# Altium PCB Bluepill.PcbDoc
Units mil, origin at the board's own origin, x right, y up, seen from the top; angles counter-clockwise.
Board outline 2100 x 790 mil, 2 copper layers (Top Layer, Bottom Layer); 37 components, 50 nets, 178 pads, 48 vias.
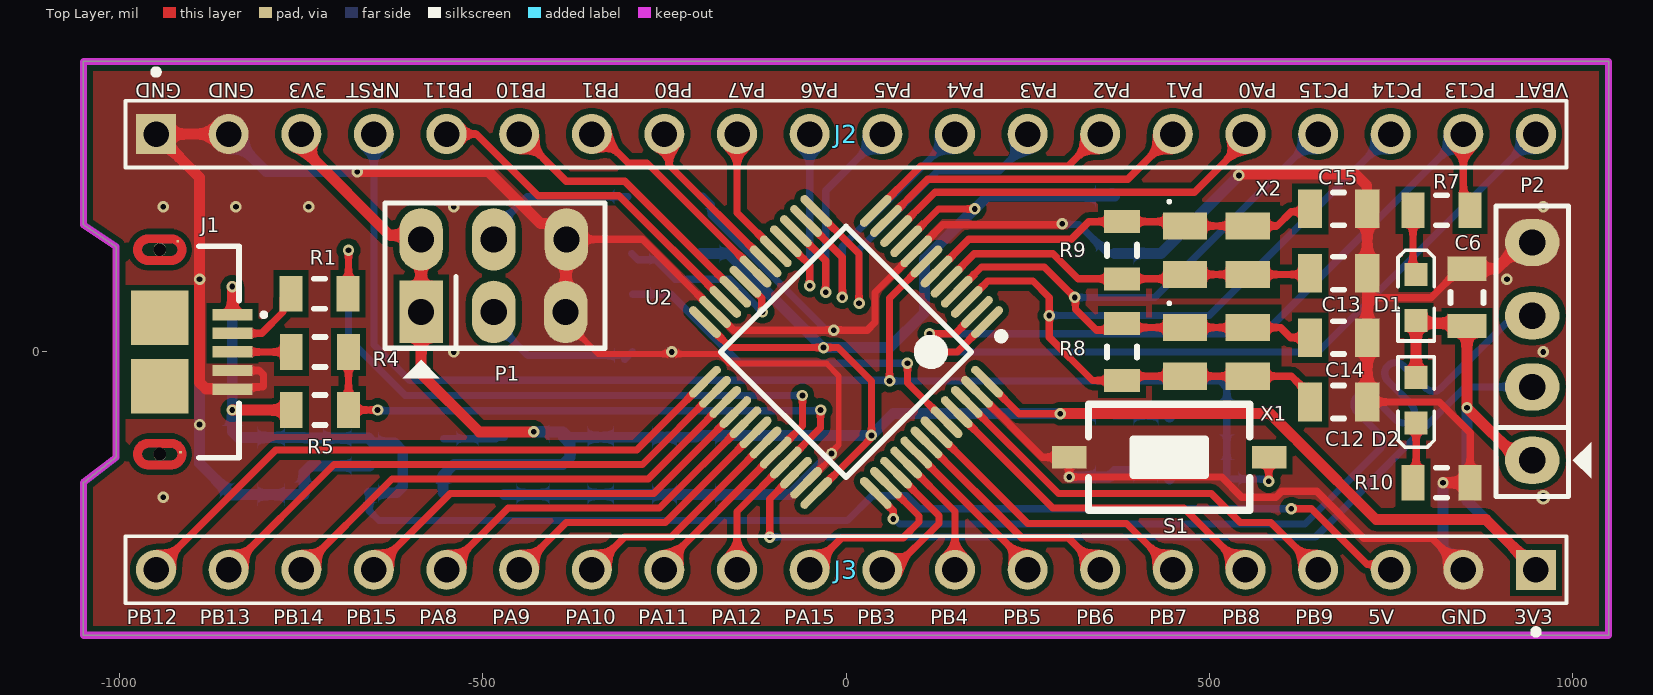
[diagram p0: Top Layer view]
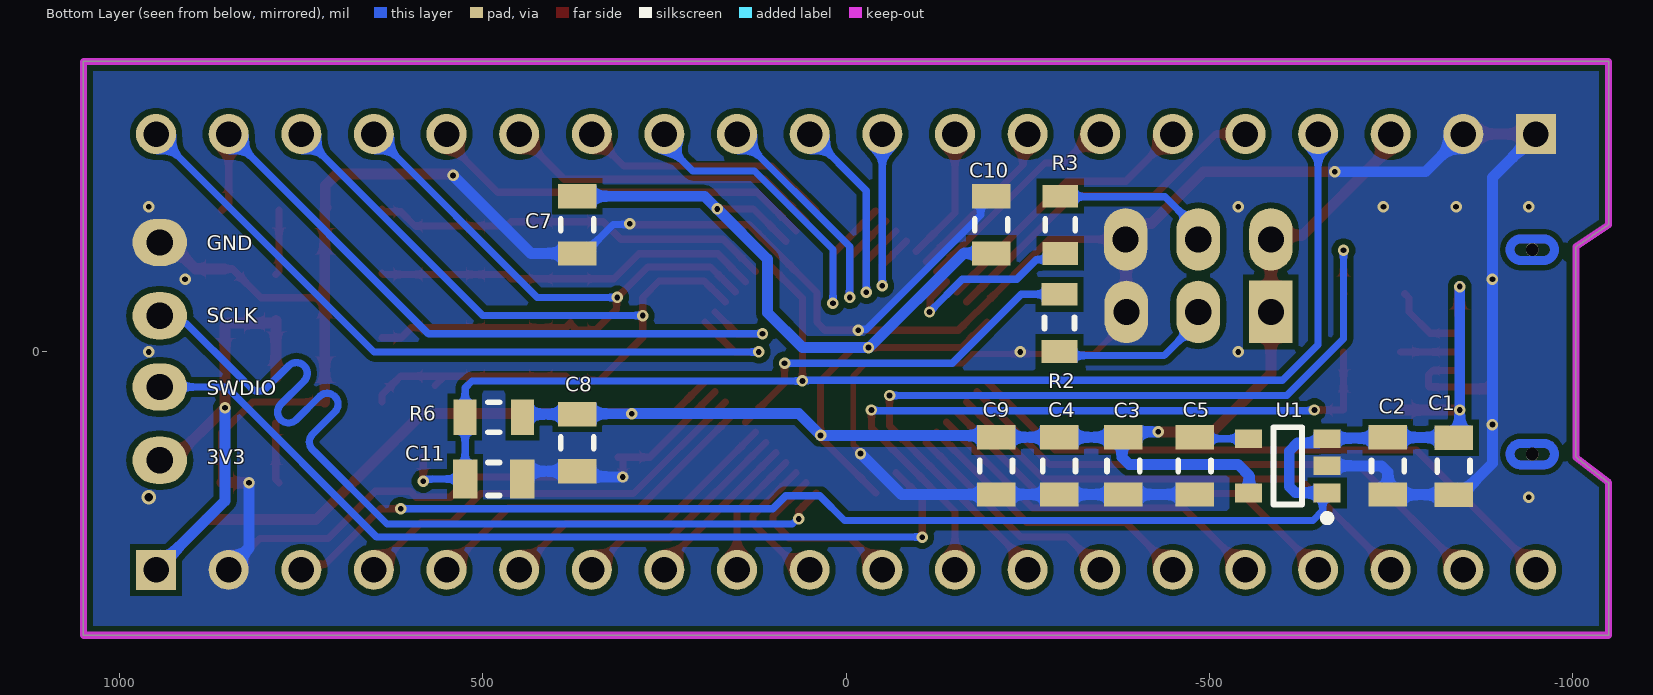
[diagram p1: Bottom Layer view, seen from below]
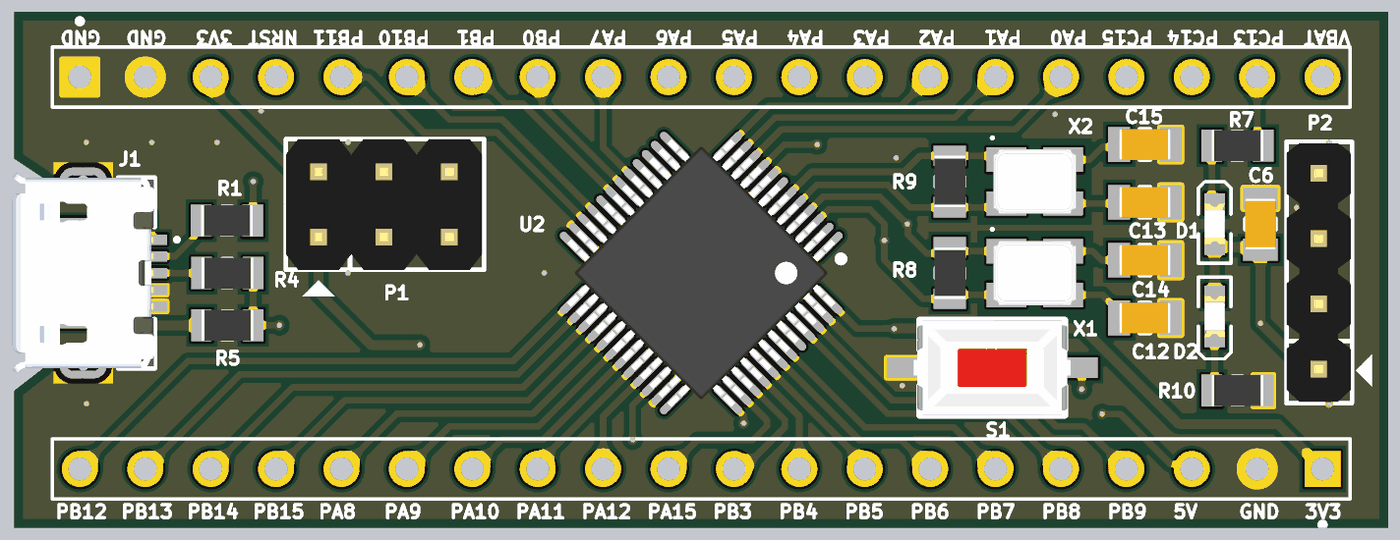
[diagram p2: 3D render of the assembled board from above, using the file's embedded part models]
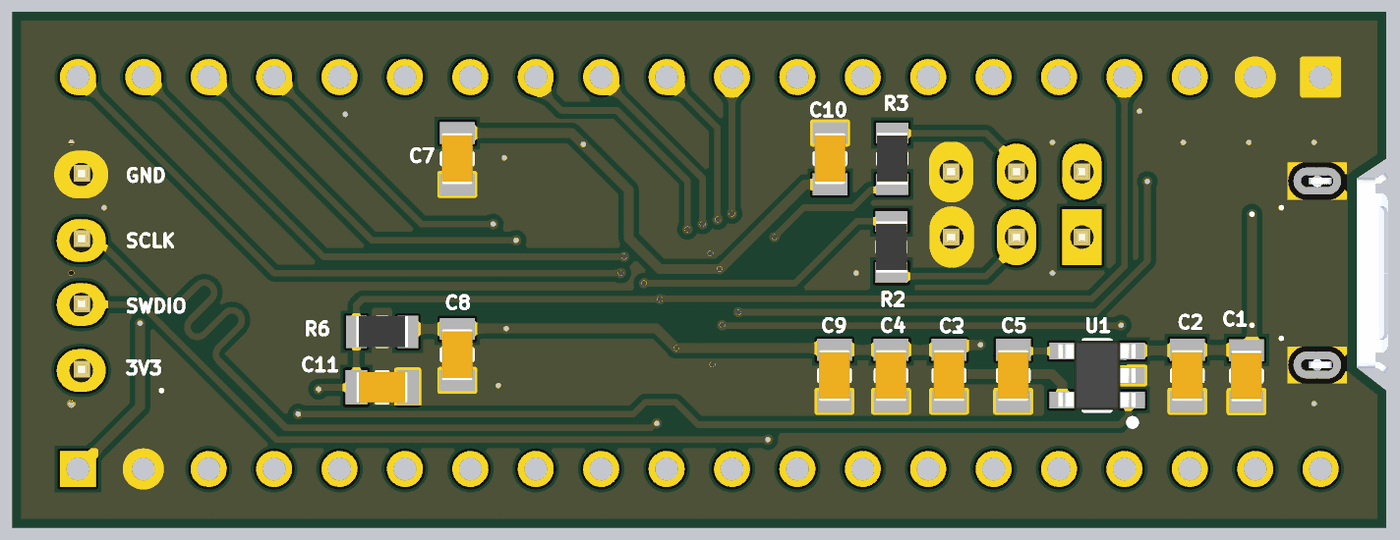
[diagram p3: 3D render of the assembled board from below, using the file's embedded part models]

## Layer stack, top to bottom
Top Solder: solder mask 0.4, Solder Resist, Dk 3.5
Top Layer: signal copper 1.4
Dielectric 1: dielectric 12.6, FR-4, Dk 4.8
Bottom Layer: signal copper 1.4
Bottom Solder: solder mask 0.4, Solder Resist, Dk 3.5

## Board outline
-1050,175 -1005,145 -1005,-145 -1050,-180 -1050,-390 1050,-390 1050,400 -1050,400

## Design rules (kind name [scope] priority, off if disabled: settings)
Clearance [All] p1: gap=8 ignorepadtopadclearanceinfootprint=FALSE except(0: Arc-Hole Track-Hole SMDPad-Hole THPad-Hole Via-Hole Fill-Hole Poly-Hole Region-Hole Text-Hole)
PolygonConnect [All] p1: connectstyle=Direct reliefconductorwidth=10 reliefentries=4 polygonreliefangle="90 Angle" airgapwidth=10
RoutingVias [All] p1: holewidth=7.87 width=15.75 viastyle="Through Hole" minholewidth=7.87 minwidth=15.75 maxholewidth=7.87 maxwidth=15.75
SolderMaskExpansion [All] p1: expansion=4 istentingtop=FALSE
Width [All] p1: maxlimit=15 minlimit=8 preferedwidth=10
30 further rules are at their usual default settings.

## Classes and differential pairs
component class Bluepill: C1 C2 C4 C6 C7 C8 C9 C10 C11 C12 C13 C14 C15 D1 D2 J1 J2 J3 P1 P2 R1 R2 R3 R4 R5 R6 R7 R8 R9 R10 S1 U1 U2 X1 X2

## Components (designator, comment, footprint, x,y, rotation, side; value= is the part's Value field where it differs from the comment)
C1 "Capacitor" C0805 -836.61,-157.48 r90 bottom value=105
C2 "Capacitor" C0805 -746.1,-156.89 r90 bottom value=104
C3 "Capacitor" C0805 -381.93,-156.89 r90 bottom value=106
C4 "Capacitor" C0805 -293.35,-156.89 r90 bottom value=104
C5 "Capacitor" C0805 -480,-156.89 r90 bottom value=104
C6 "Capacitor" C0805 855,75 r270 top value=104
C7 "Capacitor" C0805 370,175 r90 bottom value=104
C8 "Capacitor" C0805 370,-125 r90 bottom value=104
C9 "Capacitor" C0805 -206.69,-156.89 r90 bottom value=104
C10 "Capacitor" C0805 -200,175 r270 bottom value=104
C11 "Capacitor" C0805 485,-175 r0 bottom value=104
C12 "Capacitor" C0805 678.35,-68.9 r0 top value=20pF
C13 "Capacitor" C0805 678.35,108.27 r0 top value=20pF
C14 "Capacitor" C0805 678.35,19.68 r0 top value=20pF
C15 "Capacitor" C0805 678.35,196.85 r0 top value=20pF
D1 "LED SMD" LED_0603_Blue 785,75 r90 top
D2 "LED SMD" LED_0603_Blue 785,-66.5 r270 top
J1 "USB micro" GCT_USB3090-XX-X_REVE -944.88,0 r270 top
J2 "2-87220-0" TE_2-87220-0 0,300 r0 top
J3 "2-87220-0" TE_2-87220-0 0,-300 r180 top
P1 "Header 3X2" JP3x2 -485,105 r0 top
P2 "Header 4" JP4 944.88,-49.21 r90 top
R1 "Resistor" R0805 -725,80 r180 top value=20
R2 "Resistor" R0805 -294,40 r90 bottom value=100K
R3 "Resistor" R0805 -295,175 r90 bottom value=100K
R4 "Resistor" R0805 -724.37,0 r180 top value=20
R5 "Resistor" R0805 -724.37,-80 r0 top value=4.7k
R6 "Resistor" R0805 485,-90 r180 bottom value=10K
R7 "Resistor" R0805 820,195 r180 top value=10K
R8 "Resistor" R0805 380,0 r270 top value=1M
R9 "Resistor" R0805 380,140 r270 top value=1M
R10 "Resistor" R0805 820,-180 r180 top value=10K
S1 "Tact SW - 2Pin" SW-SMD 445,-145 r0 top
U1 "3.3V, 300 mA" RT9193-xxGB -608.31,-156.89 r0 bottom
U2 "STM32F103C8T6" TSQFP50P900X900X160-48N 0,0 r225 top
X1 "XTAL" "XTAL 3225" 510,0 r0 top value=16MHz
X2 "XTAL" "XTAL 3225" 510,140 r0 top value=16MHz

## Footprints (in the part's own frame and the unit in brackets; to place one, negate y for a bottom-side part, rotate by r counter-clockwise, add the part's x,y. Pads: shape width x height; smd on the part's side, far side on the other; paste and mask are expansions set on the pad)
C0805 [mm] "Chip Capacitor, 2-Leads, Body 2.00x1.20mm, IPC Medium Density"
  rect 0.85x1.35 smd: 1(-1,0) 2(1,0)
  silkscreen extent -0.2,-0.58 0.2,0.58, body extent -1,-0.6 1,0.6, height 0.45
GCT_USB3090-XX-X_REVE [mm]
  rect 0.4x1.4 smd: 1(-1.3,2.55) 2(-0.65,2.55) 3(0,2.55) 4(0.65,2.55) 5(1.3,2.55)
  rect 0.1x0.1 smd paste-1 mask+0: 6(-3.87,0.63) 7(3.51,0.72)
  rect 1.9x2 smd: 8(-1.2,0) 9(1.2,0)
  round 0.45 hole 0.45 unplated: ""(-3.575,0) ""(3.575,0)
  Top Layer region: -3.548,0.924 -3.52,0.922 -3.493,0.919 -3.466,0.914 -3.439,0.907 -3.413,0.899 -3.387,0.89 -3.361,0.88 -3.337,0.868 -3.313,0.855 -3.289,0.84 -3.266,0.825 -3.245,0.808 -3.224,0.79 -3.204,0.771 -3.185,0.751 -3.167,0.73 -3.15,0.709 -3.135,0.686 -3.12,0.662 -3.107,0.638 -3.095,0.614 -3.085,0.588 -3.076,0.562 -3.068,0.536 -3.061,0.509 -3.056,0.482 -3.053,0.455 -3.051,0.427 -3.05,0.4 -3.05,0 -3.35,0 -3.35,0.4 -3.35,0.412 -3.351,0.424 -3.353,0.435 -3.355,0.447 -3.358,0.458 -3.361,0.47 -3.365,0.481 -3.369,0.492 -3.375,0.502 -3.38,0.512 -3.386,0.523 -3.393,0.532 -3.4,0.542 -3.408,0.551 -3.416,0.559 -3.424,0.567 -3.433,0.575 -3.443,0.582 -3.452,0.589 -3.463,0.595 -3.473,0.6 -3.483,0.606 -3.494,0.61 -3.505,0.614 -3.517,0.617 -3.528,0.62 -3.54,0.622 -3.551,0.624 -3.563,0.625 -3.587,0.625 -3.599,0.624 -3.61,0.622 -3.622,0.62 -3.633,0.617 -3.645,0.614 -3.656,0.61 -3.667,0.606 -3.677,0.6 -3.688,0.595 -3.698,0.589 -3.707,0.582 -3.717,0.575 -3.726,0.567 -3.734,0.559 -3.742,0.551 -3.75,0.542 -3.757,0.532 -3.764,0.523 -3.77,0.513 -3.775,0.502 -3.781,0.492 -3.785,0.481 -3.789,0.47 -3.792,0.458 -3.795,0.447 -3.797,0.435 -3.799,0.424 -3.8,0.412 -3.8,0.4 -3.8,0 -4.1,0 -4.1,0.4 -4.099,0.427 -4.097,0.455 -4.094,0.482 -4.089,0.509 -4.082,0.536 -4.074,0.562 -4.065,0.588 -4.055,0.614 -4.043,0.638 -4.03,0.663 -4.015,0.686 -4,0.709 -3.983,0.73 -3.965,0.751 -3.946,0.771 -3.926,0.79 -3.905,0.808 -3.884,0.825 -3.861,0.84 -3.837,0.855 -3.813,0.868 -3.789,0.88 -3.763,0.89 -3.737,0.899 -3.711,0.907 -3.684,0.914 -3.657,0.919 -3.63,0.922 -3.602,0.924 -3.575,0.925
  Top Layer region: -3.05,-0.4 -3.051,-0.427 -3.053,-0.455 -3.056,-0.482 -3.061,-0.509 -3.068,-0.536 -3.076,-0.562 -3.085,-0.588 -3.095,-0.614 -3.107,-0.638 -3.12,-0.662 -3.135,-0.686 -3.15,-0.709 -3.167,-0.73 -3.185,-0.751 -3.204,-0.771 -3.224,-0.79 -3.245,-0.808 -3.266,-0.825 -3.289,-0.84 -3.313,-0.855 -3.337,-0.868 -3.361,-0.88 -3.387,-0.89 -3.413,-0.899 -3.439,-0.907 -3.466,-0.914 -3.493,-0.919 -3.52,-0.922 -3.548,-0.924 -3.575,-0.925 -3.602,-0.924 -3.63,-0.922 -3.657,-0.919 -3.684,-0.914 -3.711,-0.907 -3.737,-0.899 -3.763,-0.89 -3.789,-0.88 -3.813,-0.868 -3.837,-0.855 -3.861,-0.84 -3.884,-0.825 -3.905,-0.808 -3.926,-0.79 -3.946,-0.771 -3.965,-0.751 -3.983,-0.73 -4,-0.709 -4.015,-0.686 -4.03,-0.663 -4.043,-0.638 -4.055,-0.614 -4.065,-0.588 -4.074,-0.562 -4.082,-0.536 -4.089,-0.509 -4.094,-0.482 -4.097,-0.455 -4.099,-0.427 -4.1,-0.4 -4.1,0 -3.8,0 -3.8,-0.4 -3.8,-0.412 -3.799,-0.424 -3.797,-0.435 -3.795,-0.447 -3.792,-0.458 -3.789,-0.47 -3.785,-0.481 -3.781,-0.492 -3.775,-0.502 -3.77,-0.513 -3.764,-0.523 -3.757,-0.532 -3.75,-0.542 -3.742,-0.551 -3.734,-0.559 -3.726,-0.567 -3.717,-0.575 -3.707,-0.582 -3.698,-0.589 -3.688,-0.595 -3.677,-0.6 -3.667,-0.606 -3.656,-0.61 -3.645,-0.614 -3.633,-0.617 -3.622,-0.62 -3.61,-0.622 -3.599,-0.624 -3.587,-0.625 -3.563,-0.625 -3.551,-0.624 -3.54,-0.622 -3.528,-0.62 -3.517,-0.617 -3.505,-0.614 -3.494,-0.61 -3.483,-0.606 -3.473,-0.6 -3.463,-0.595 -3.452,-0.589 -3.443,-0.582 -3.433,-0.575 -3.424,-0.567 -3.416,-0.559 -3.408,-0.551 -3.4,-0.542 -3.393,-0.532 -3.386,-0.523 -3.38,-0.512 -3.375,-0.502 -3.369,-0.492 -3.365,-0.481 -3.361,-0.47 -3.358,-0.458 -3.355,-0.447 -3.353,-0.435 -3.351,-0.424 -3.35,-0.412 -3.35,-0.4 -3.35,0 -3.05,0
  Top Layer region: 3.602,0.924 3.63,0.922 3.657,0.919 3.684,0.914 3.711,0.907 3.737,0.899 3.763,0.89 3.789,0.88 3.813,0.868 3.837,0.855 3.861,0.84 3.884,0.825 3.905,0.808 3.926,0.79 3.946,0.771 3.965,0.751 3.983,0.73 4,0.709 4.015,0.686 4.03,0.663 4.043,0.638 4.055,0.614 4.065,0.588 4.074,0.562 4.082,0.536 4.089,0.509 4.094,0.482 4.097,0.455 4.099,0.427 4.1,0.4 4.1,0 3.8,0 3.8,0.4 3.8,0.412 3.799,0.424 3.797,0.435 3.795,0.447 3.792,0.458 3.789,0.47 3.785,0.481 3.781,0.492 3.775,0.502 3.77,0.513 3.764,0.523 3.757,0.532 3.75,0.542 3.742,0.551 3.734,0.559 3.726,0.567 3.717,0.575 3.707,0.582 3.698,0.589 3.688,0.595 3.677,0.6 3.667,0.606 3.656,0.61 3.645,0.614 3.633,0.617 3.622,0.62 3.61,0.622 3.599,0.624 3.587,0.625 3.563,0.625 3.551,0.624 3.54,0.622 3.528,0.62 3.517,0.617 3.505,0.614 3.494,0.61 3.483,0.606 3.473,0.6 3.463,0.595 3.452,0.589 3.443,0.582 3.433,0.575 3.424,0.567 3.416,0.559 3.408,0.551 3.4,0.542 3.393,0.532 3.386,0.523 3.38,0.512 3.375,0.502 3.369,0.492 3.365,0.481 3.361,0.47 3.358,0.458 3.355,0.447 3.353,0.435 3.351,0.424 3.35,0.412 3.35,0.4 3.35,0 3.05,0 3.05,0.4 3.051,0.427 3.053,0.455 3.056,0.482 3.061,0.509 3.068,0.536 3.076,0.562 3.085,0.588 3.095,0.614 3.107,0.638 3.12,0.662 3.135,0.686 3.15,0.709 3.167,0.73 3.185,0.751 3.204,0.771 3.224,0.79 3.245,0.808 3.266,0.825 3.289,0.84 3.313,0.855 3.337,0.868 3.361,0.88 3.387,0.89 3.413,0.899 3.439,0.907 3.466,0.914 3.493,0.919 3.52,0.922 3.548,0.924 3.575,0.925
  Top Layer region: 4.1,-0.4 4.099,-0.427 4.097,-0.455 4.094,-0.482 4.089,-0.509 4.082,-0.536 4.074,-0.562 4.065,-0.588 4.055,-0.614 4.043,-0.638 4.03,-0.663 4.015,-0.686 4,-0.709 3.983,-0.73 3.965,-0.751 3.946,-0.771 3.926,-0.79 3.905,-0.808 3.884,-0.825 3.861,-0.84 3.837,-0.855 3.813,-0.868 3.789,-0.88 3.763,-0.89 3.737,-0.899 3.711,-0.907 3.684,-0.914 3.657,-0.919 3.63,-0.922 3.602,-0.924 3.575,-0.925 3.548,-0.924 3.52,-0.922 3.493,-0.919 3.466,-0.914 3.439,-0.907 3.413,-0.899 3.387,-0.89 3.361,-0.88 3.337,-0.868 3.313,-0.855 3.289,-0.84 3.266,-0.825 3.245,-0.808 3.224,-0.79 3.204,-0.771 3.185,-0.751 3.167,-0.73 3.15,-0.709 3.135,-0.686 3.12,-0.662 3.107,-0.638 3.095,-0.614 3.085,-0.588 3.076,-0.562 3.068,-0.536 3.061,-0.509 3.056,-0.482 3.053,-0.455 3.051,-0.427 3.05,-0.4 3.05,0 3.35,0 3.35,-0.4 3.35,-0.412 3.351,-0.424 3.353,-0.435 3.355,-0.447 3.358,-0.458 3.361,-0.47 3.365,-0.481 3.369,-0.492 3.375,-0.502 3.38,-0.512 3.386,-0.523 3.393,-0.532 3.4,-0.542 3.408,-0.551 3.416,-0.559 3.424,-0.567 3.433,-0.575 3.443,-0.582 3.452,-0.589 3.463,-0.595 3.473,-0.6 3.483,-0.606 3.494,-0.61 3.505,-0.614 3.517,-0.617 3.528,-0.62 3.54,-0.622 3.551,-0.624 3.563,-0.625 3.587,-0.625 3.599,-0.624 3.61,-0.622 3.622,-0.62 3.633,-0.617 3.645,-0.614 3.656,-0.61 3.667,-0.606 3.677,-0.6 3.688,-0.595 3.698,-0.589 3.707,-0.582 3.717,-0.575 3.726,-0.567 3.734,-0.559 3.742,-0.551 3.75,-0.542 3.757,-0.532 3.764,-0.523 3.77,-0.513 3.775,-0.502 3.781,-0.492 3.785,-0.481 3.789,-0.47 3.792,-0.458 3.795,-0.447 3.797,-0.435 3.799,-0.424 3.8,-0.412 3.8,-0.4 3.8,0 4.1,0
  Bottom Layer region: -3.548,0.924 -3.52,0.922 -3.493,0.919 -3.466,0.914 -3.439,0.907 -3.413,0.899 -3.387,0.89 -3.361,0.88 -3.337,0.868 -3.313,0.855 -3.289,0.84 -3.266,0.825 -3.245,0.808 -3.224,0.79 -3.204,0.771 -3.185,0.751 -3.167,0.73 -3.15,0.709 -3.135,0.686 -3.12,0.662 -3.107,0.638 -3.095,0.614 -3.085,0.588 -3.076,0.562 -3.068,0.536 -3.061,0.509 -3.056,0.482 -3.053,0.455 -3.051,0.427 -3.05,0.4 -3.05,0 -3.35,0 -3.35,0.4 -3.35,0.412 -3.351,0.424 -3.353,0.435 -3.355,0.447 -3.358,0.458 -3.361,0.47 -3.365,0.481 -3.369,0.492 -3.375,0.502 -3.38,0.512 -3.386,0.523 -3.393,0.532 -3.4,0.542 -3.408,0.551 -3.416,0.559 -3.424,0.567 -3.433,0.575 -3.443,0.582 -3.452,0.589 -3.463,0.595 -3.473,0.6 -3.483,0.606 -3.494,0.61 -3.505,0.614 -3.517,0.617 -3.528,0.62 -3.54,0.622 -3.551,0.624 -3.563,0.625 -3.587,0.625 -3.599,0.624 -3.61,0.622 -3.622,0.62 -3.633,0.617 -3.645,0.614 -3.656,0.61 -3.667,0.606 -3.677,0.6 -3.688,0.595 -3.698,0.589 -3.707,0.582 -3.717,0.575 -3.726,0.567 -3.734,0.559 -3.742,0.551 -3.75,0.542 -3.757,0.532 -3.764,0.523 -3.77,0.513 -3.775,0.502 -3.781,0.492 -3.785,0.481 -3.789,0.47 -3.792,0.458 -3.795,0.447 -3.797,0.435 -3.799,0.424 -3.8,0.412 -3.8,0.4 -3.8,0 -4.1,0 -4.1,0.4 -4.099,0.427 -4.097,0.455 -4.094,0.482 -4.089,0.509 -4.082,0.536 -4.074,0.562 -4.065,0.588 -4.055,0.614 -4.043,0.638 -4.03,0.663 -4.015,0.686 -4,0.709 -3.983,0.73 -3.965,0.751 -3.946,0.771 -3.926,0.79 -3.905,0.808 -3.884,0.825 -3.861,0.84 -3.837,0.855 -3.813,0.868 -3.789,0.88 -3.763,0.89 -3.737,0.899 -3.711,0.907 -3.684,0.914 -3.657,0.919 -3.63,0.922 -3.602,0.924 -3.575,0.925
  Bottom Layer region: -3.05,-0.4 -3.051,-0.427 -3.053,-0.455 -3.056,-0.482 -3.061,-0.509 -3.068,-0.536 -3.076,-0.562 -3.085,-0.588 -3.095,-0.614 -3.107,-0.638 -3.12,-0.662 -3.135,-0.686 -3.15,-0.709 -3.167,-0.73 -3.185,-0.751 -3.204,-0.771 -3.224,-0.79 -3.245,-0.808 -3.266,-0.825 -3.289,-0.84 -3.313,-0.855 -3.337,-0.868 -3.361,-0.88 -3.387,-0.89 -3.413,-0.899 -3.439,-0.907 -3.466,-0.914 -3.493,-0.919 -3.52,-0.922 -3.548,-0.924 -3.575,-0.925 -3.602,-0.924 -3.63,-0.922 -3.657,-0.919 -3.684,-0.914 -3.711,-0.907 -3.737,-0.899 -3.763,-0.89 -3.789,-0.88 -3.813,-0.868 -3.837,-0.855 -3.861,-0.84 -3.884,-0.825 -3.905,-0.808 -3.926,-0.79 -3.946,-0.771 -3.965,-0.751 -3.983,-0.73 -4,-0.709 -4.015,-0.686 -4.03,-0.663 -4.043,-0.638 -4.055,-0.614 -4.065,-0.588 -4.074,-0.562 -4.082,-0.536 -4.089,-0.509 -4.094,-0.482 -4.097,-0.455 -4.099,-0.427 -4.1,-0.4 -4.1,0 -3.8,0 -3.8,-0.4 -3.8,-0.412 -3.799,-0.424 -3.797,-0.435 -3.795,-0.447 -3.792,-0.458 -3.789,-0.47 -3.785,-0.481 -3.781,-0.492 -3.775,-0.502 -3.77,-0.513 -3.764,-0.523 -3.757,-0.532 -3.75,-0.542 -3.742,-0.551 -3.734,-0.559 -3.726,-0.567 -3.717,-0.575 -3.707,-0.582 -3.698,-0.589 -3.688,-0.595 -3.677,-0.6 -3.667,-0.606 -3.656,-0.61 -3.645,-0.614 -3.633,-0.617 -3.622,-0.62 -3.61,-0.622 -3.599,-0.624 -3.587,-0.625 -3.563,-0.625 -3.551,-0.624 -3.54,-0.622 -3.528,-0.62 -3.517,-0.617 -3.505,-0.614 -3.494,-0.61 -3.483,-0.606 -3.473,-0.6 -3.463,-0.595 -3.452,-0.589 -3.443,-0.582 -3.433,-0.575 -3.424,-0.567 -3.416,-0.559 -3.408,-0.551 -3.4,-0.542 -3.393,-0.532 -3.386,-0.523 -3.38,-0.512 -3.375,-0.502 -3.369,-0.492 -3.365,-0.481 -3.361,-0.47 -3.358,-0.458 -3.355,-0.447 -3.353,-0.435 -3.351,-0.424 -3.35,-0.412 -3.35,-0.4 -3.35,0 -3.05,0
  Bottom Layer region: 3.602,0.924 3.63,0.922 3.657,0.919 3.684,0.914 3.711,0.907 3.737,0.899 3.763,0.89 3.789,0.88 3.813,0.868 3.837,0.855 3.861,0.84 3.884,0.825 3.905,0.808 3.926,0.79 3.946,0.771 3.965,0.751 3.983,0.73 4,0.709 4.015,0.686 4.03,0.663 4.043,0.638 4.055,0.614 4.065,0.588 4.074,0.562 4.082,0.536 4.089,0.509 4.094,0.482 4.097,0.455 4.099,0.427 4.1,0.4 4.1,0 3.8,0 3.8,0.4 3.8,0.412 3.799,0.424 3.797,0.435 3.795,0.447 3.792,0.458 3.789,0.47 3.785,0.481 3.781,0.492 3.775,0.502 3.77,0.513 3.764,0.523 3.757,0.532 3.75,0.542 3.742,0.551 3.734,0.559 3.726,0.567 3.717,0.575 3.707,0.582 3.698,0.589 3.688,0.595 3.677,0.6 3.667,0.606 3.656,0.61 3.645,0.614 3.633,0.617 3.622,0.62 3.61,0.622 3.599,0.624 3.587,0.625 3.563,0.625 3.551,0.624 3.54,0.622 3.528,0.62 3.517,0.617 3.505,0.614 3.494,0.61 3.483,0.606 3.473,0.6 3.463,0.595 3.452,0.589 3.443,0.582 3.433,0.575 3.424,0.567 3.416,0.559 3.408,0.551 3.4,0.542 3.393,0.532 3.386,0.523 3.38,0.512 3.375,0.502 3.369,0.492 3.365,0.481 3.361,0.47 3.358,0.458 3.355,0.447 3.353,0.435 3.351,0.424 3.35,0.412 3.35,0.4 3.35,0 3.05,0 3.05,0.4 3.051,0.427 3.053,0.455 3.056,0.482 3.061,0.509 3.068,0.536 3.076,0.562 3.085,0.588 3.095,0.614 3.107,0.638 3.12,0.662 3.135,0.686 3.15,0.709 3.167,0.73 3.185,0.751 3.204,0.771 3.224,0.79 3.245,0.808 3.266,0.825 3.289,0.84 3.313,0.855 3.337,0.868 3.361,0.88 3.387,0.89 3.413,0.899 3.439,0.907 3.466,0.914 3.493,0.919 3.52,0.922 3.548,0.924 3.575,0.925
  Bottom Layer region: 4.1,-0.4 4.099,-0.427 4.097,-0.455 4.094,-0.482 4.089,-0.509 4.082,-0.536 4.074,-0.562 4.065,-0.588 4.055,-0.614 4.043,-0.638 4.03,-0.663 4.015,-0.686 4,-0.709 3.983,-0.73 3.965,-0.751 3.946,-0.771 3.926,-0.79 3.905,-0.808 3.884,-0.825 3.861,-0.84 3.837,-0.855 3.813,-0.868 3.789,-0.88 3.763,-0.89 3.737,-0.899 3.711,-0.907 3.684,-0.914 3.657,-0.919 3.63,-0.922 3.602,-0.924 3.575,-0.925 3.548,-0.924 3.52,-0.922 3.493,-0.919 3.466,-0.914 3.439,-0.907 3.413,-0.899 3.387,-0.89 3.361,-0.88 3.337,-0.868 3.313,-0.855 3.289,-0.84 3.266,-0.825 3.245,-0.808 3.224,-0.79 3.204,-0.771 3.185,-0.751 3.167,-0.73 3.15,-0.709 3.135,-0.686 3.12,-0.662 3.107,-0.638 3.095,-0.614 3.085,-0.588 3.076,-0.562 3.068,-0.536 3.061,-0.509 3.056,-0.482 3.053,-0.455 3.051,-0.427 3.05,-0.4 3.05,0 3.35,0 3.35,-0.4 3.35,-0.412 3.351,-0.424 3.353,-0.435 3.355,-0.447 3.358,-0.458 3.361,-0.47 3.365,-0.481 3.369,-0.492 3.375,-0.502 3.38,-0.512 3.386,-0.523 3.393,-0.532 3.4,-0.542 3.408,-0.551 3.416,-0.559 3.424,-0.567 3.433,-0.575 3.443,-0.582 3.452,-0.589 3.463,-0.595 3.473,-0.6 3.483,-0.606 3.494,-0.61 3.505,-0.614 3.517,-0.617 3.528,-0.62 3.54,-0.622 3.551,-0.624 3.563,-0.625 3.587,-0.625 3.599,-0.624 3.61,-0.622 3.622,-0.62 3.633,-0.617 3.645,-0.614 3.656,-0.61 3.667,-0.606 3.677,-0.6 3.688,-0.595 3.698,-0.589 3.707,-0.582 3.717,-0.575 3.726,-0.567 3.734,-0.559 3.742,-0.551 3.75,-0.542 3.757,-0.532 3.764,-0.523 3.77,-0.513 3.775,-0.502 3.781,-0.492 3.785,-0.481 3.789,-0.47 3.792,-0.458 3.795,-0.447 3.797,-0.435 3.799,-0.424 3.8,-0.412 3.8,-0.4 3.8,0 4.1,0
  silkscreen extent -3.7,1.37 3.7,3.69, body extent -3.9,-2.75 3.9,2.75, height 2.71
JP3x2 [mil] "Connector 3x2"
  rect 60x86 hole 36: 1(-100,-50)
  oval 60x86 hole 36: 2(0,-50) 3(99,-50) 4(-100,50) 5(0,50) 6(100,50)
  silkscreen extent -150,-141 153,100, body extent -150,-100 150,100, height 335
JP4 [mil] "Jumper 4"
  oval 65x75 hole 36: 1(-100,0) 2(1,0) 3(99,0) 4(200,0)
  silkscreen extent -150,-81 250,50, body extent -148,-48 248,50, height 323
LED_0603_Blue [mm] "Chip LED, 2-Leads, Body 1.6x0.8mm, IPC Medium Density"
  rect 0.8x0.8 smd: 1(-0.8,0) 2(0.8,0)
  silkscreen extent -1.52,-0.64 1.65,0.64, body extent -0.8,-0.4 0.8,0.4, height 0.7
R0805 [mm] "Chip Resistor, 2-Leads, Body 2.00x1.20mm, IPC Medium Density"
  rect 0.8x1.25 smd: 1(-1,0) 2(1,0)
  silkscreen extent -0.2,-0.53 0.2,0.53, body extent -1,-0.6 1,0.6, height 0.45
RT9193-xxGB [mm] "SOT23, 5-Leads, Body 2.90x2.79mm, Pitch 0.95mm, IPC Medium Density"
  rect 0.95x0.65 smd: 1(-1.375,0.95) 2(-1.375,0) 3(-1.375,-0.95) 4(1.375,-0.95) 5(1.375,0.95)
  silkscreen extent -1.5,-1.35 0.5,1.95, body extent -1.5,-1.35 1.5,1.35, height 1.3
SW-SMD [mm] "Switch SMD type"
  rect 1.2x0.8 smd: 1(-3.5,0) 2(3.5,0)
  silkscreen extent -2.82,-1.85 2.82,1.85, body extent -3.05,-1.85 3.05,1.85, height 2.5
TE_2-87220-0 [mm]
  rect 1.398x1.398 hole 0.89: 1(-24.13,0)
  round 1.398 hole 0.89: 2(-21.59,0) 3(-19.05,0) 4(-16.51,0) 5(-13.97,0) 6(-11.43,0) 7(-8.89,0) 8(-6.35,0) 9(-3.81,0) 10(-1.27,0) 11(1.27,0) 12(3.81,0) 13(6.35,0) 14(8.89,0) 15(11.43,0) 16(13.97,0) 17(16.51,0) 18(19.05,0) 19(21.59,0) 20(24.13,0)
  silkscreen extent -25.2,-1.17 25.2,2.27
TSQFP50P900X900X160-48N [mm] "TSQFP, 48-Leads, Body 7.00x7.00mm, Pitch 0.50mm, IPC Medium Density"
  oval 1.45x0.3 smd: 1(-4.225,2.75) 2(-4.225,2.25) 3(-4.225,1.75) 4(-4.225,1.25) 5(-4.225,0.75) 6(-4.225,0.25) 7(-4.225,-0.25) 8(-4.225,-0.75) 9(-4.225,-1.25) 10(-4.225,-1.75) 11(-4.225,-2.25) 12(-4.225,-2.75) 25(4.225,-2.75) 26(4.225,-2.25) 27(4.225,-1.75) 28(4.225,-1.25) 29(4.225,-0.75) 30(4.225,-0.25) 31(4.225,0.25) 32(4.225,0.75) 33(4.225,1.25) 34(4.225,1.75) 35(4.225,2.25) 36(4.225,2.75)
  oval 0.3x1.45 smd: 13(-2.75,-4.225) 14(-2.25,-4.225) 15(-1.75,-4.225) 16(-1.25,-4.225) 17(-0.75,-4.225) 18(-0.25,-4.225) 19(0.25,-4.225) 20(0.75,-4.225) 21(1.25,-4.225) 22(1.75,-4.225) 23(2.25,-4.225) 24(2.75,-4.225) 37(2.75,4.225) 38(2.25,4.225) 39(1.75,4.225) 40(1.25,4.225) 41(0.75,4.225) 42(0.25,4.225) 43(-0.25,4.225) 44(-0.75,4.225) 45(-1.25,4.225) 46(-1.75,4.225) 47(-2.25,4.225) 48(-2.75,4.225)
  silkscreen extent -4.35,-3.1 3.1,3.57, body extent -4.5,-4.5 4.5,4.5, height 1.6
"XTAL 3225" [mm]
  rect 1.55x0.95 smd: 1(-1.1,-0.85) 2(1.1,-0.85) 3(1.1,0.85) 4(-1.1,0.85)
  silkscreen extent -1.7,1.65 -1.6,1.75, body extent -1.6,-1.25 1.6,1.25, height 0.55

## Part data
D1 D2: "LED"
J1: library part USB3090-XX-X_REVE, "USB - micro AB USB 2.0 Receptacle Connector 5 Position Surface Mount, Right Angle; Through Hole, 2.35mm profile, 5 Pins, Horizontal, Bottom mount", Package=None, Check_prices=https://www.snapeda.com/parts/USB3090-30-A/Global+Connector+Technology/view-part/?ref=eda, MF="Global Connector Technology", MP=USB3090-30-A, SnapEDA_Link=https://www.snapeda.com/parts/USB3090-30-A/Global+Connector+Technology/view-part/?ref=snap
J2 J3: "Conn Unshrouded Header HDR 20 POS 2.54mm Solder ST Thru-Hole Carton", Package=None, Availability=Warning, Centerline_Pitch="2.54 mm[.1 in]", Check_prices=https://www.snapeda.com/parts/2-87220-0/TE%20Connectivity%20AMP%20Connectors/view-part/397035/?ref=eda, EU_RoHS_Compliance=Compliant, MF="TE Connectivity", MP=2-87220-0, Number_of_Positions=20, Price=None, Product_Type=Connector, Purchase-URL=https://pricing.snapeda.com/search/part/2-87220-0/?ref=eda, SnapEDA_Link=https://www.snapeda.com/parts/2-87220-0/TE%20Connectivity%20AMP%20Connectors/view-part/397035/?ref=snap
P1: "Header, 3-Pin, Dual row", LatestRevisionDate=17-Jul-2002, LatestRevisionNote="Re-released for DXP Platform.", Publisher="Altium Limited"
P2: "Header, 4-Pin", LatestRevisionDate=17-Jul-2002, LatestRevisionNote="Re-released for DXP Platform.", Publisher="Altium Limited"
S1: "Switch button 2 pin"
U1: library part RT9193-33GB, "LDO Voltage Regulators 300mA, Ultra-Low Noise, Ultra-Fast CMOS LDO Regulator, SOT-23-5,  3.3 V", Current Output="300 mA", Manufacturer=Richtek, Operating Temperature="- 40 C to  + 85 C", Rated Current="90 uA", Voltage Drop="220 mV", Voltage Input Maximum=5.5V, Voltage Input Minimum=2.5V, Voltage Output=3.3V, ComponentLink1Description="Datasheet link", ComponentLink1URL=https://www.mouser.vn/datasheet/2/1458/DS9193_18-3104722.pdf, ComponentLink2Description="Supplier 1 URL", ComponentLink2URL=https://www.mouser.vn/ProductDetail/Richtek/RT9193-33GB?qs=amGC7iS6iy8ybRcZ9Wn2ww%3D%3D, ComponentLink3Description="Supplier 2 URL", ComponentLink3URL=https://www.digikey.com/en/products/detail/richtek-usa-inc/RT9193-33GB/2470048?s=N4IgTCBcDaIEoBUCcBGJBmAtO9BxAQiALoC%2BQA, ComponentLink4Description="Supplier 3 URL", ComponentLink4URL=N/A, Mounting Technology=SMD/SMT, Packaging=SOT-23-5, Product="LDO Voltage Regulators", PSRR="- 70 dB", Supplier 1 Name=Mouser, Supplier 1 SN=835-RT9193-33GB, Supplier 1 URL=https://www.mouser.vn/ProductDetail/Richtek/RT9193-33GB?qs=amGC7iS6iy8ybRcZ9Wn2ww%3D%3D, Supplier 2 Name=Digi-Key, Supplier 2 SN=1028-1014-6-ND, Supplier 2 URL=https://www.digikey.com/en/products/detail/richtek-usa-inc/RT9193-33GB/2470048?s=N4IgTCBcDaIEoBUCcBGJBmAtO9BxAQiALoC%2BQA, Supplier 3 Name=thegioiic, Supplier 3 SN=N/A, Supplier 3 URL=N/A
U2: Manufacturer=ST, ComponentLink1Description="Supplier 1 Link"

## Via types
v1: diameter 15.75, hole 7.87, Top Layer to Bottom Layer, tented both sides, 47 vias
v2: diameter 19.68, hole 11.81, Top Layer to Bottom Layer, tented both sides, 1 vias

## Nets (pads, with @x,y where several pads share a name; then routed paths per layer and width w, separated by ;. In a path a pad name is that pad's centre, name@x,y a point inside that pad or via, vN(x,y) a via of type N, cw(c..) or ccw(c..) an arc to the next point about the centre after c; other vN are vias at no path point)
3V3: C3.2 C4.2 C6.2 C7.2 C8.2 C9.2 C10.2 D1.1 D2.1 J2.3 J3.1 P1.1 P1.4 P2.1 R6.2 U1.5 U2.9 U2.24 U2.36 U2.48 | length 4571.6
  Top Layer w10: U2.24 -159.11,6 v1(-31,6) ; U2.36 33.9,-119.21 33.9,-116.1 v1(35,-115) 35,-40 -11,6 v1@-29.44,6 ; U2.9 127.25,196.85 v1(177.17,196.85) ; U2.48 238.11,-85 v1(295,-85)
  Top Layer w15: J2.3 -742.34,292.34 -742.34,274.34 -628.71,160.71 -590.71,160.71 P1.4 P1.1 -585,-30 -505,-110 v1(-430,-110) ; v1(295,-85) 584,-85 616.37,-117.37 616.45,-117.37 624.99,-125.91 730.09,-231 881,-231 J3.1 ; D2.1 D1.1 788.94,39.57 851.06,39.57 C6.2 v1(855,-77) 927.21,-149.21 P2.1
  Bottom Layer w15: U1.5 -555,-193.46 -555,-170 -540,-155 -390,-155 -380,-145 -380,-126.65 C3.2@-389.13,-117.52 ; v1@-429.8,-110 -389.45,-110 C3.2 C4.2 C9.2 -204.32,-115.14 34.86,-115.14 65,-85 v1(295,-85) 295.14,-85.14 369.51,-85.14 C8.2 441.26,-85.63 R6.2 ; C10.2 -161.63,135.63 -32,6 v1(-31,6) 60,6 108,54 108,127.68 v1(177.17,196.85) 177.37,196.85 194.89,214.37 C7.2 C7.2@366.37,218 ; v1(855,-77) 855,-205 J3.1
5V: C1.2 C2.2 J1.1 J3.3 R5.1 U1.1 U1.3 | length 2157.6
  Top Layer w10: v1(613.13,-215.87) 640.87,-215.87 717.43,-292.43 742.43,-292.43 J3.3
  Top Layer w15: v1(-845,-80) R5.1 ; v1(-845,90) -845,89.8 -844.49,89.29 J1.1
  Bottom Layer w10: U1.1@-656.34,-193.9 -656.34,-218.66 -643,-232 2,-232 36,-198 83,-198 101,-216 613,-216 v1(613.13,-215.87)
  Bottom Layer w15: v1(-845,90) -845,-109.72 C1.2 -836.32,-117.81 -746.4,-117.81 C2.2 -744.92,-118.7 -657.52,-118.7 -656.34,-119.88 -650.65,-125.57 -621.41,-125.57 -610.24,-136.74 -610.24,-185.11 -619.02,-193.9 U1.1@-656.34,-193.9
BOOT0: R2.2 U2.44 | length 521.4
  Top Layer w10: v1(84.55,-15.55) 84.55,-42.79 U2.44
  Bottom Layer w10: R2.2 -241.37,79.37 -146.45,-15.55 v1(84.55,-15.55)
BOOT1: R3.1 U2.20 | length 264.9
  Top Layer w10: U2.20 -138.5,96.25 -116.1,73.85 -116.1,56.1 v1(-115,55)
  Bottom Layer w10: R3.1 -286.4,127.03 -262.03,127.03 -235,100 -160,100 v1(-115,55)
GND: C1.1 C2.1 C3.1 C4.1 C5.1 C6.1 C7.1 C8.1 C9.1 C10.1 C11.1 C12.2 C13.2 C14.2 C15.2 J1.4 J1.5 J2.1 J2.2 J3.2 P1.3 P1.6 P2.4 R10.1 S1.1 U1.2 U2.8 U2.23 U2.35 U2.47 | length 6567.9
  Top Layer w8: P1.3 -386,39 -383,39 -341,-3 -174.16,-3 -161.16,-16 -27,-16 -10,-33 -10,-127.9 -20,-137.9 v1(-20,-140) -21.48,-141.48 -21.48,-146.76 U2.35
  Top Layer w10: J1.5 -841.61,-48.31 -803.16,-48.31 -802,-47.14 -802,-31.45 -807.86,-25.59 J1.4 ; P1.6@-397,167 P1.6 -280.27,155 U2.23 -179.77,54.98 -154.78,30 v1(-17,30) 29.14,30 40,40.86 40,81.76 U2.8 133.24,175 294.38,175 294.68,175.3 296.71,175.3 v1(297.81,176.4) ; U2.47 270.27,-145 S1.1 ; S1.1@313.88,-145 S1.1 ; C12.2 816.9,-68.9 859.37,-111.37 R10.1 ; 717.72,74.72 805.5,74.72 845.16,114.37 C6.1 ; J3.2 807,-257 713,-257 648,-192 600,-192 592,-200 545,-200 517.2,-172.2 v1(307.2,-172.2) S1.1
  Top Layer w15: J2.2 J2.1 -890.01,240.01 -890.01,-42.02 -881.22,-50.81 -844.86,-50.81 J1.5 ; v1(-673,248) -492,248 -461.83,217.83 -420.61,176.61 -405.79,176.61 -397,167.82 P1.6@-397,167 ; P1.3 -385.5,55.5 -385.5,154.5 P1.6 ; v1(541,243) 541.2,243 543.2,245 701,245 717,229 717,199.57 716,198.57 C15.2 C13.2 717.72,74.72 C14.2 C12.2 ; v1(822,-180) R10.1 ; C6.1 895.63,114.37 932.05,150.79 P2.4
  Bottom Layer w10: C10.1 -197.23,214.37 -185.5,202.64 -185.5,188.5 -28.1,31.1 -18.1,31.1 v1(-17,30) ; v1(297.81,176.4) 298.91,175.3 320.49,175.3 360.16,135.63 C7.1 ; C8.1@370,-165 C8.1 ; C11.1@442.83,-172.2 C11.1 ; v1@538,243 v1(541,243)
  Bottom Layer w15: J2.1 -890,240 -890,-153.31 -846.46,-196.85 C1.1 -836.32,-196.56 -746.4,-196.56 C2.1 -746.1,-165.68 -737.32,-156.89 U1.2@-656.34,-156.89 ; J2.2@-850,289.17 J2.2 -798,248 v1(-673,248) ; C5.1@-470.51,-196.26 C3.1 C4.1 C9.1 -76.26,-196.26 v1(-20,-140) ; v1(307.2,-172.2) 307.35,-172.06 362.31,-172.06 C8.1 436.4,-164.37 445.63,-173.6 C11.1 ; C7.1 433.63,135.63 v1(541,243) ; v1(822,-180) 822,-270 850,-298 J3.2
  other v1: -940,-200 960,-200 -890,-100 -540,0 -240,0 960,0 -890,100 910,100 -940,200 -840,200 -740,200 -540,200 960,200
  other v2: 960,-200
NetC5_2: C5.2 U1.4 | length 84.5
  Bottom Layer w10: U1.4 -481.97,-119.49 C5.2 C5.2@-470.51,-117.52
NetD1_2: D1.2 R7.2 | length 90.3
  Top Layer w10: R7.2 780.63,110.87 D1.2
NetD2_2: D2.2 R10.2 | length 83.8
  Top Layer w10: R10.2 785,-175.63 D2.2
NetJ1_2: J1.2 R1.2 | length 109
  Top Layer w10: J1.2 -804.41,25.59 -775.12,54.88 -775.12,74.25 R1.2@-769.37,80
NetJ1_3: J1.3 R4.2 | length 80.7
  Top Layer w10: J1.3 R4.2
NetP1_2: P1.2 R2.1 | length 219.5
  Bottom Layer w10: P1.2 -485,42 -438,-5 R2.1@-313,-5 ; R2.1@-304.63,-10 R2.1
NetP1_5: P1.5 R3.2 | length 226.9
  Bottom Layer w10: P1.5@-490,170 P1.5@-490,180 ; P1.5 -485,168 -439.26,213.74 R3.2@-300,213.74
NRST: C11.2 J2.4 R6.1 S1.2 U2.7 | length 1892.4
  Top Layer w10: v1(60,-40) 60,73.92 U2.7 ; v1(582,-178) 582,-145.8 S1.2
  Bottom Layer w10: J2.4 -650,10 -600.87,-39.13 59.13,-39.13 v1(60,-40) 515,-40 524.37,-49.37 R6.1 C11.2 577.44,-175 580.44,-178 v1(582,-178)
OSC_IN: C13.1 R9.2 U2.5 X2.1 X2.2 | length 533.7
  Top Layer w10: U2.5 176.76,135 285,135 319.37,100.63 R9.2 460.79,100.63 X2.1 X2.2 637.24,106.54 C13.1
OSC_OUT: C15.1 R9.1 U2.6 X2.3 X2.4 | length 555
  Top Layer w10: U2.6 168.92,155 310,155 334.37,179.37 R9.1 460.79,179.37 X2.4 X2.3 593.46,173.46 613.1,193.1 635.23,193.1 C15.1
PA0: J2.16 U2.10 | length 542.3
  Top Layer w10: U2.10 122.47,219.91 479.91,219.91 550,290 J2.16
PA1: J2.15 U2.11 | length 444.6
  Top Layer w10: U2.11 112.63,237.91 387.91,237.91 J2.15
PA2: J2.14 U2.12 | length 352.8
  Top Layer w10: U2.12 102.79,255.91 305.91,255.91 J2.14
PA3: J2.13 U2.13 | length 530.6
  Top Layer w10: U2.13 18,135.11 v1(18,67)
  Bottom Layer w10: v1(18,67) 18,141 126,249 211.19,249 250,287.81 J2.13
PA4: J2.12 U2.14 | length 415.2
  Top Layer w10: U2.14 -5,130.27 v1(-5,75)
  Bottom Layer w10: v1(-5,75) -5,145 J2.12
PA5: J2.11 U2.15 | length 351.6
  Top Layer w10: U2.15 -28,125.44 v1(-28,82)
  Bottom Layer w10: v1(-28,82) -28,222 J2.11
PA6: J2.10 U2.16 | length 284
  Top Layer w10: U2.16 -50,119.6 v1(-50,91)
  Bottom Layer w10: v1(-50,91) J2.10
PA7: J2.9 U2.17 | length 183.6
  Top Layer w10: J2.9 -150,191.76 U2.17
PA8: J3.16 U2.29 | length 495.7
  Top Layer w10: J3.16 -465,-215 -256.76,-215 U2.29
PA9: J3.15 U2.30 | length 403.8
  Top Layer w10: J3.15 -385,-235 -248.92,-235 U2.30
PA10: J3.14 U2.31 | length 312
  Top Layer w10: J3.14 -305,-255 -241.08,-255 U2.31
PA11: J3.13 R1.1 U2.32 | length 1158.3
  Top Layer w10: R1.1 -685,80.63 v1(-685,140) ; J3.13 -250,-292.25 -96.74,-138.99 U2.32 -60,-101.76 v1(-60,-60)
  Bottom Layer w10: v1(-685,140) -685,18 -607,-60 v1(-60,-60)
PA12: J3.12 R4.1 R5.2 U2.33 | length 998.4
  Top Layer w10: R4.1 -685,-75 R5.2 v1(-645,-80) ; J3.12 -150,-219.6 U2.33 -35,-104.6 v1(-35,-80)
  Bottom Layer w10: v1(-645,-80) -644.13,-80.87 -35.87,-80.87 v1(-35,-80)
PA15: J3.11 U2.38 | length 250.6
  Top Layer w10: J3.11 -5.91,-255.91 78.74,-255.91 100.54,-234.1 100.54,-225.82 U2.38
PB0: J2.8 U2.18 | length 233.1
  Top Layer w10: J2.8 -243.56,293.56 -243.56,257.48 U2.18
PB1: J2.7 U2.19 | length 303.4
  Top Layer w10: J2.7@-349.67,299.67 -339.67,299.67 -300,260 -273.92,260 U2.19
PB3: J3.10 U2.39 | length 198.7
  Top Layer w10: J3.10 64.17,-300 127.95,-236.22 127.95,-225.39 U2.39
PB4: J3.9 U2.40 | length 175.4
  Top Layer w10: U2.40 150,-219.6 J3.9
PB5: J3.8 U2.41 | length 225
  Top Layer w10: U2.41 96.74,-138.99 250,-292.25 J3.8
PB6: J3.7 U2.42 | length 312
  Top Layer w10: U2.42 241.99,-255.91 305.91,-255.91 J3.7
PB7: J3.6 U2.43 | length 403.8
  Top Layer w10: U2.43 250.14,-236.22 386.22,-236.22 J3.6
PB8: J3.5 U2.45 | length 487.5
  Top Layer w10: U2.45 284.6,-215 465,-215 J3.5
PB9: J3.4 U2.46 | length 579.4
  Top Layer w10: U2.46 292.44,-195 503,-195 543,-235 585,-235 J3.4
PB10: J2.6 U2.21 | length 387.5
  Top Layer w10: J2.6 -385,235 -304.6,235 U2.21
PB11: J2.5 U2.22 | length 479.4
  Top Layer w10: J2.5 -509,300 -424,215 -312.44,215 U2.22
PB12: J3.20 U2.25 | length 863.1
  Top Layer w10: J3.20 -785,-135 -288.11,-135 U2.25
PB13: J3.19 U2.26 | length 771.2
  Top Layer w10: J3.19 -705,-155 -280.27,-155 U2.26
PB14: J3.18 U2.27 | length 679.4
  Top Layer w10: J3.18 -625,-175 -272.44,-175 U2.27
PB15: J3.17 U2.28 | length 587.5
  Top Layer w10: J3.17 -545,-195 -264.6,-195 U2.28
PC13: J2.19 R7.1 U2.2 | length 1035.5
  Top Layer w10: v1(115,25) 150.27,25 U2.2 ; J2.19 850,204.37 R7.1
  Bottom Layer w10: v1(115,25) 575,25 J2.19
PC14: C12.1 J2.18 R8.2 U2.3 X1.1 X1.2 | length 1187.8
  Top Layer w10: U2.3 195,97.56 257.44,97.56 280,75 280,20 339.37,-39.37 R8.2 385.91,-33.46 X1.2 ; X1.2@565.94,-46.1 X1.2 ; C12.1 638.98,-59.06 613.39,-33.46 X1.2
  Bottom Layer w10: v1(280,50) 500,50 J2.18
PC15: C14.1 J2.17 R8.1 U2.4 X1.3 X1.4 | length 986.7
  Top Layer w10: U2.4 186.6,117 273,117 316.1,73.9 316.1,58.9 345,30 370.63,30 R8.1 ; R8.1@379.37,40 385.91,33.46 X1.3 598.46,33.46 612.24,19.68 C14.1
  Bottom Layer w10: v1(315,75) 425,75 J2.17
SWCLK: P2.3 U2.37 | length 1293.1
  Top Layer w10: U2.37 41.06,-194.67 65,-218.6 v1(65,-230)
  Bottom Layer w10: v1(65,-230) 66.56,-230 73.56,-237 632,-237 730.93,-138.07 734.47,-134.53 ccw(c723.86,-123.93) 734.47,-113.32 703.77,-82.62 cw(c714.38,-72.02) 703.77,-61.41 cw(c714.38,-72.02) 724.98,-61.41 756.99,-93.41 ccw(c767.59,-82.81) 778.2,-93.41 ccw(c767.59,-82.81) 778.2,-72.2 746.2,-40.2 cw(c756.8,-29.59) 746.2,-18.98 cw(c756.8,-29.59) 767.41,-18.98 798.11,-49.68 ccw(c808.71,-39.07) 819.32,-49.68 836.2,-32.8 908.26,39.26 934.36,39.26 P2.3
SWDIO: P2.2 U2.34 | length 1239.2
  Top Layer w10: v1(-105,-255) -105,-202.44 U2.34
  Bottom Layer w10: v1(-105,-255) 646,-255 852.79,-48.21 P2.2
VBAT: J2.20 U2.1 | length 1045.4
  Top Layer w10: v1(120,0) 153.11,0 U2.1
  Bottom Layer w10: v1(120,0) 650,0 J2.20
pads on no net: J1. J1.6 J1.7 J1.8 J1.9

## Polygon pours and split planes (outlines as drawn)
GND on Top Layer "GND_L01_P000" (solid, remove dead copper, pour order 0): -1050,175 -1005,145 -1005,-145 -1050,-180 -1050,-390 1050,-390 1050,400 -1050,400
GND on Bottom Layer "GND_L02_P001" (solid, remove dead copper, pour order 1): -1050,175 -1005,145 -1005,-145 -1050,-180 -1050,-390 1050,-390 1050,400 -1050,400

## Keep-outs
Keep-Out Layer:
  the board outline again, w10

## Other copper
Top Layer:
  pour cut-out: 422,65 599.15,65 599.15,-67 422,-64.97
  pour cut-out: 419.68,206 597,206 597,74 422,74

## Silkscreen, mask and mechanical layers (free items; w line width, h text height)
Top Overlay:
  text "GND" at -915,370 h20 r180
  text "GND" at -814.47,370 h20 r180
  text "3V3" at -713.95,370 h20 r180
  text "NRST" at -613.42,370 h20 r180
  text "PB11" at -512.89,370 h20 r180
  text "PB10" at -412.37,370 h20 r180
  text "PB1" at -311.84,370 h20 r180
  text "PB0" at -211.32,370 h20 r180
  text "PA7" at -110.79,370 h20 r180
  text "PA6" at -10.26,370 h20 r180
  text "PA5" at 90.26,370 h20 r180
  text "PA4" at 190.79,370 h20 r180
  text "PA3" at 291.32,370 h20 r180
  text "PA2" at 391.84,370 h20 r180
  text "PA1" at 492.37,370 h20 r180
  text "PA0" at 592.89,370 h20 r180
  text "PC15" at 693.42,370 h20 r180
  text "PC14" at 793.95,370 h20 r180
  text "PC13" at 894.47,370 h20 r180
  text "VBAT" at 995,370 h20 r180
  text "PB12" at -990,-375 h20
  text "PB13" at -889.47,-375 h20
  text "PB14" at -788.95,-375 h20
  text "PB15" at -688.42,-375 h20
  text "PA8" at -587.89,-375 h20
  text "PA9" at -487.37,-375 h20
  text "PA10" at -386.84,-375 h20
  text "PA11" at -286.32,-375 h20
  text "PA12" at -185.79,-375 h20
  text "PA15" at -85.26,-375 h20
  text "PB3" at 15.26,-375 h20
  text "PB4" at 115.79,-375 h20
  text "PB5" at 216.32,-375 h20
  text "PB6" at 316.84,-375 h20
  text "PB7" at 417.37,-375 h20
  text "PB8" at 517.89,-375 h20
  text "PB9" at 618.42,-375 h20
  text "5V" at 718.95,-375 h20
  text "GND" at 819.47,-375 h20
  text "3V3" at 920,-375 h20
Bottom Overlay:
  text "GND" at 880,140 h20
  text "SCLK" at 880,40 h20
  text "SWDIO" at 880,-60 h20
  text "3V3" at 880,-155 h20

## Text inside footprints (layer, text, board x,y; h text height)
J1: Mechanical 13 "PCB Edge" at -1044.9,75.01 h26.25 r270